# Altium PCB PCB1.PcbDoc (part 3 of 3)
Units mil, origin at the board's own origin, x right, y up, seen from the top; angles counter-clockwise.
Board outline 1614.17 x 4106.3 mil, 2 copper layers (Top Layer, Bottom Layer), stack 61.8 mil thick; 17 components, 26 nets, 94 pads, 42 vias.
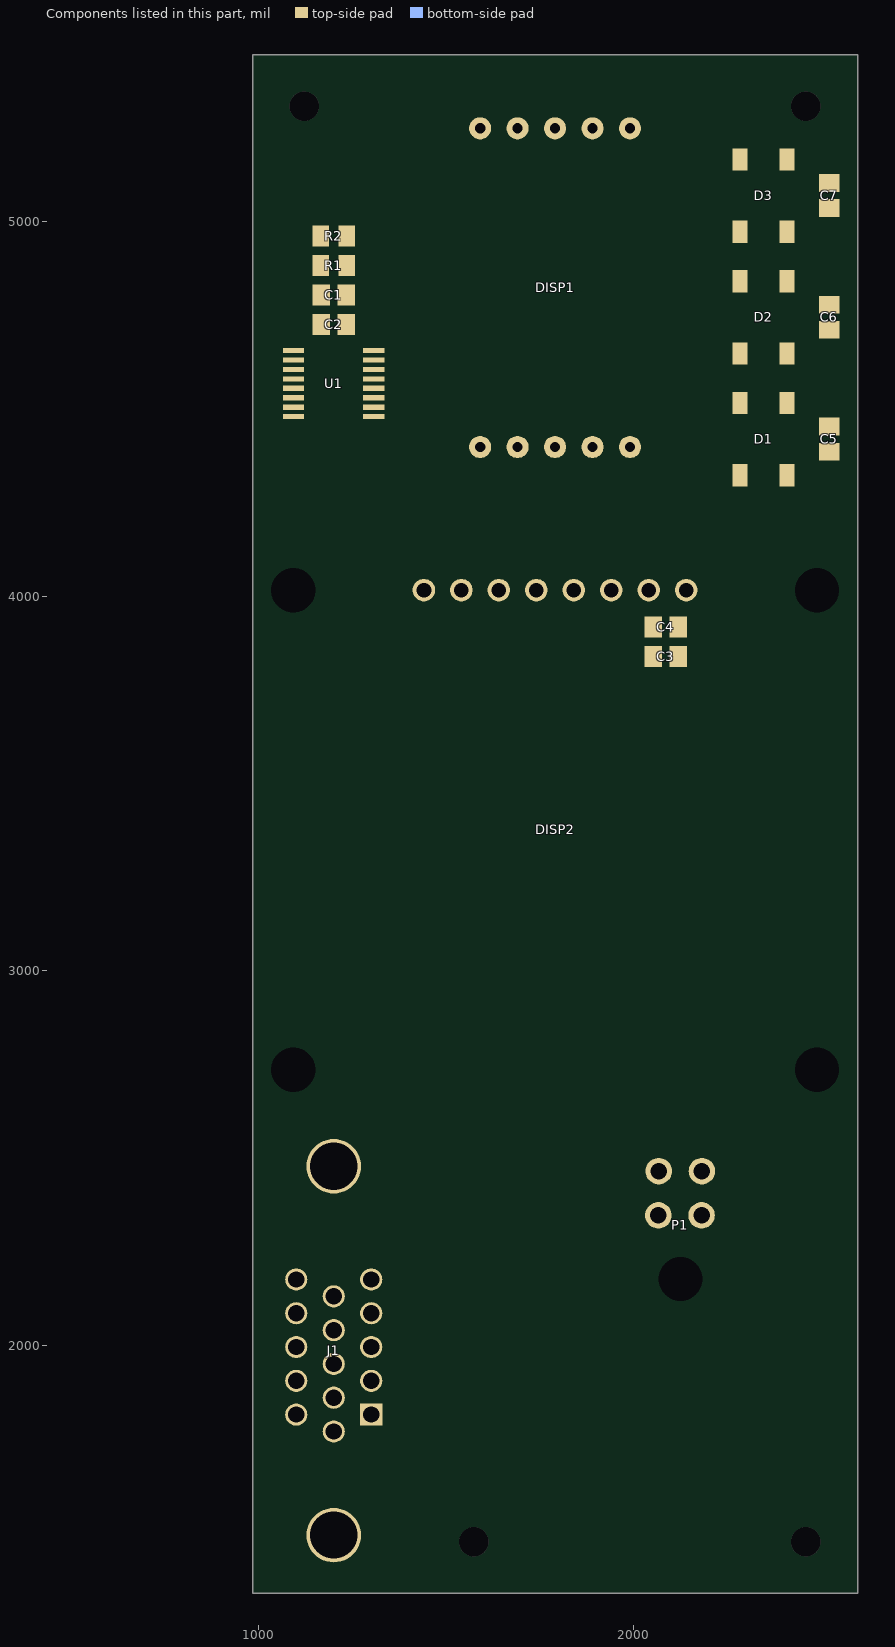
[diagram p3: the components of this part, seen from the top]

## Via types
v1: diameter 35.43/35.43 (per signal layer), hole 11.81, Top Layer to Bottom Layer, tented both sides, 42 vias

## Nets (pads, with @x,y where several pads share a name; then routed paths per layer and width w, separated by ;. In a path a pad name is that pad's centre, name@x,y a point inside that pad or via, vN(x,y) a via of type N, cw(c..) or ccw(c..) an arc to the next point about the centre after c; other vN are vias at no path point) (continued)
copper on no net: (continued)
  Bottom Layer w1: 2175.4,1628 2215.4,1628 ; 2175.4,1629 2215.4,1629 ; 2175.4,1630 2215.4,1630 ; 2175.4,1631 2215.4,1631 ; 2175.4,1632 2215.4,1632 ; 2175.4,1633 2215.4,1633 ; 2175.4,1634 2215.4,1634 ; 2175.4,1635 2215.4,1635 ; 2175.4,1636 2215.4,1636 ; 2175.4,1637 2215.4,1637 ; 2175.4,1638 2215.4,1638 ; 2175.4,1639 2215.4,1639 ; 2175.4,1640 2215.4,1640 ; 2175.4,1641 2215.4,1641 ; 2175.4,1642 2215.4,1642 ; 2175.4,1643 2214.4,1643 ; 2175.4,1644 2213.4,1644 ; 2175.4,1645 2181.4,1645 ; 2175.4,1646 2180.4,1646 ; 2175.4,1647 2179.4,1647 ; 2175.4,1648 2179.4,1648 ; 2175.4,1649 2179.4,1649 ; 2175.4,1650 2179.4,1650 ; 2189.4,1693 2206.4,1693 ; 2189.4,1694 2206.4,1694 ; 2189.4,1695 2206.4,1695 ; 2189.4,1696 2206.4,1696 ; 2189.4,1697 2206.4,1697 ; 2189.4,1698 2206.4,1698 ; 2189.4,1699 2206.4,1699 ; 2189.4,1700 2206.4,1700 ; 2189.4,1701 2206.4,1701 ; 2189.4,1702 2206.4,1702 ; 2189.4,1703 2206.4,1703 ; 2189.4,1704 2206.4,1704 ; 2189.4,1705 2206.4,1705 ; 2189.4,1706 2206.4,1706 ; 2189.4,1707 2206.4,1707 ; 2189.4,1708 2206.4,1708 ; 2189.4,1709 2206.4,1709 ; 2189.4,1710 2206.4,1710 ; 2189.4,1711 2206.4,1711 ; 2189.4,1712 2206.4,1712 ; 2189.4,1713 2206.4,1713 ; 2194.4,1845 2362.4,1845 ; 2198.4,1744 2235.4,1744 ; 2202.4,1844 2362.4,1844 ; 2205.4,1743 2233.4,1743 ; 2209.4,1742 2233.4,1742 ; 2211.4,1741 2233.4,1741 ; 2211.4,1843 2362.4,1843 ; 2212.4,1611 2230.4,1611 ; 2213.4,1740 2233.4,1740 ; 2215.4,1612 2228.4,1612 ; 2215.4,1651 2228.4,1651 ; 2215.4,1739 2233.4,1739 ; 2217.4,1613 2228.4,1613 ; 2217.4,1650 2228.4,1650 ; 2217.4,1738 2233.4,1738 ; 2218.4,1737 2233.4,1737 ; 2218.4,1842 2362.4,1842 ; 2219.4,1614 2228.4,1614 ; 2219.4,1649 2228.4,1649 ; 2219.4,1736 2233.4,1736 ; 2220.4,1615 2228.4,1615 ; 2220.4,1648 2228.4,1648 ; 2221.4,1616 2228.4,1616 ; 2221.4,1617 2228.4,1617 ; 2221.4,1646 2228.4,1646 ; 2221.4,1647 2228.4,1647 ; 2221.4,1735 2233.4,1735 ; 2222.4,1618 2228.4,1618 ; 2222.4,1619 2228.4,1619 ; 2222.4,1644 2228.4,1644 ; 2222.4,1645 2228.4,1645 ; 2222.4,1734 2233.4,1734 ; 2223.4,1620 2228.4,1620 ; 2223.4,1621 2228.4,1621 ; 2223.4,1622 2228.4,1622 ; 2223.4,1623 2228.4,1623 ; 2223.4,1624 2228.4,1624 ; 2223.4,1625 2228.4,1625 ; 2223.4,1626 2228.4,1626 ; 2223.4,1627 2228.4,1627 ; 2223.4,1628 2228.4,1628 ; 2223.4,1629 2228.4,1629 ; 2223.4,1630 2228.4,1630 ; 2223.4,1631 2228.4,1631 ; 2223.4,1632 2228.4,1632 ; 2223.4,1633 2228.4,1633 ; 2223.4,1634 2228.4,1634 ; 2223.4,1635 2228.4,1635 ; 2223.4,1636 2228.4,1636 ; 2223.4,1637 2228.4,1637 ; 2223.4,1638 2228.4,1638 ; 2223.4,1639 2228.4,1639 ; 2223.4,1640 2228.4,1640 ; 2223.4,1641 2228.4,1641 ; 2223.4,1642 2228.4,1642 ; 2223.4,1643 2228.4,1643 ; 2223.4,1732 2233.4,1732 ; 2223.4,1733 2233.4,1733 ; 2224.4,1731 2233.4,1731 ; 2225.4,1730 2233.4,1730 ; 2226.4,1728 2233.4,1728 ; 2226.4,1729 2233.4,1729 ; 2227.4,1726 2233.4,1726 ; 2227.4,1727 2233.4,1727 ; 2228.4,1723 2233.4,1723 ; 2228.4,1724 2233.4,1724 ; 2228.4,1725 2233.4,1725 ; 2229.4,1718 2233.4,1718 ; 2229.4,1719 2233.4,1719 ; 2229.4,1720 2233.4,1720 ; 2229.4,1721 2233.4,1721 ; 2229.4,1722 2233.4,1722 ; 2229.4,1839 2362.4,1839 ; 2229.4,1840 2362.4,1840 ; 2229.4,1841 2362.4,1841 ; 2230.4,1687 2233.4,1687 ; 2230.4,1688 2233.4,1688 ; 2230.4,1689 2233.4,1689 ; 2230.4,1690 2233.4,1690 ; 2230.4,1691 2233.4,1691 ; 2230.4,1692 2233.4,1692 ; 2230.4,1693 2233.4,1693 ; 2230.4,1694 2233.4,1694 ; 2230.4,1695 2233.4,1695 ; 2230.4,1696 2233.4,1696 ; 2230.4,1697 2233.4,1697 ; 2230.4,1698 2233.4,1698 ; 2230.4,1699 2233.4,1699 ; 2230.4,1700 2233.4,1700 ; 2230.4,1701 2233.4,1701 ; 2230.4,1702 2233.4,1702 ; 2230.4,1703 2233.4,1703 ; 2230.4,1704 2233.4,1704 ; 2230.4,1705 2233.4,1705 ; 2230.4,1706 2233.4,1706 ; 2230.4,1707 2233.4,1707 ; 2230.4,1708 2233.4,1708 ; 2230.4,1709 2233.4,1709 ; 2230.4,1710 2233.4,1710 ; 2230.4,1711 2233.4,1711 ; 2230.4,1712 2233.4,1712 ; 2230.4,1713 2233.4,1713 ; 2230.4,1714 2233.4,1714 ; 2230.4,1715 2233.4,1715 ; 2230.4,1716 2233.4,1716 ; 2230.4,1717 2233.4,1717 ; 2232.4,1611 2279.4,1611 ; 2234.4,1612 2276.4,1612 ; 2235.4,1613 2274.4,1613 ; 2235.4,1614 2273.4,1614 ; 2235.4,1615 2271.4,1615 ; 2235.4,1616 2270.4,1616 ; 2235.4,1617 2269.4,1617 ; 2235.4,1618 2268.4,1618 ; 2235.4,1619 2268.4,1619 ; 2235.4,1620 2267.4,1620 ; 2235.4,1621 2266.4,1621 ; 2235.4,1622 2265.4,1622 ; 2235.4,1623 2265.4,1623 ; 2235.4,1624 2264.4,1624 ; 2235.4,1625 2263.4,1625 ; 2235.4,1626 2263.4,1626 ; 2235.4,1627 2262.4,1627 ; 2235.4,1628 2262.4,1628 ; 2235.4,1629 2261.4,1629 ; 2235.4,1630 2260.4,1630 ; 2235.4,1631 2260.4,1631 ; 2235.4,1632 2259.4,1632 ; 2235.4,1633 2259.4,1633 ; 2235.4,1634 2258.4,1634 ; 2235.4,1635 2257.4,1635 ; 2235.4,1636 2257.4,1636 ; 2235.4,1637 2256.4,1637 ; 2235.4,1638 2255.4,1638 ; 2235.4,1639 2255.4,1639 ; 2235.4,1640 2254.4,1640 ; 2235.4,1641 2253.4,1641 ; 2235.4,1642 2252.4,1642 ; 2235.4,1643 2251.4,1643 ; 2235.4,1644 2249.4,1644 ; 2252.4,1651 2289.4,1651 ; 2254.4,1650 2287.4,1650 ; 2255.4,1649 2285.4,1649 ; 2257.4,1648 2284.4,1648 ; 2257.4,1663 2260.4,1663 ; 2257.4,1664 2260.4,1664 ; 2257.4,1665 2260.4,1665 ; 2257.4,1666 2260.4,1666 ; 2257.4,1667 2260.4,1667 ; 2257.4,1668 2260.4,1668 ; 2257.4,1669 2260.4,1669 ; 2257.4,1670 2260.4,1670 ; 2257.4,1671 2260.4,1671 ; 2257.4,1672 2260.4,1672 ; 2257.4,1673 2260.4,1673 ; 2257.4,1674 2260.4,1674 ; 2257.4,1675 2260.4,1675 ; 2257.4,1676 2260.4,1676 ; 2257.4,1677 2260.4,1677 ; 2257.4,1678 2260.4,1678 ; 2257.4,1679 2260.4,1679 ; 2257.4,1680 2260.4,1680 ; 2257.4,1681 2260.4,1681 ; 2257.4,1682 2260.4,1682 ; 2257.4,1683 2260.4,1683 ; 2257.4,1684 2298.4,1684 ; 2257.4,1685 2297.4,1685 ; 2257.4,1686 2297.4,1686 ; 2257.4,1687 2296.4,1687 ; 2257.4,1688 2296.4,1688 ; 2257.4,1689 2296.4,1689 ; 2257.4,1690 2295.4,1690 ; 2257.4,1691 2295.4,1691 ; 2257.4,1692 2294.4,1692 ; 2257.4,1693 2294.4,1693 ; 2257.4,1694 2293.4,1694 ; 2257.4,1695 2293.4,1695 ; 2257.4,1696 2292.4,1696 ; 2257.4,1697 2292.4,1697 ; 2257.4,1698 2291.4,1698 ; 2257.4,1699 2291.4,1699 ; 2257.4,1700 2290.4,1700 ; 2257.4,1701 2290.4,1701 ; 2257.4,1702 2289.4,1702 ; 2257.4,1703 2289.4,1703 ; 2257.4,1704 2288.4,1704 ; 2257.4,1705 2288.4,1705 ; 2257.4,1706 2287.4,1706 ; 2257.4,1707 2287.4,1707 ; 2257.4,1708 2286.4,1708 ; 2257.4,1709 2286.4,1709 ; 2257.4,1710 2285.4,1710 ; 2257.4,1711 2285.4,1711 ; 2257.4,1712 2284.4,1712 ; 2257.4,1713 2284.4,1713 ; 2257.4,1714 2283.4,1714 ; 2257.4,1715 2282.4,1715 ; 2257.4,1716 2281.4,1716 ; 2257.4,1717 2281.4,1717 ; 2257.4,1718 2280.4,1718 ; 2257.4,1719 2278.4,1719 ; 2257.4,1720 2277.4,1720 ; 2257.4,1721 2275.4,1721 ; 2257.4,1722 2273.4,1722 ; 2258.4,1647 2283.4,1647 ; 2259.4,1646 2283.4,1646 ; 2260.4,1644 2282.4,1644 ; 2260.4,1645 2282.4,1645 ; 2261.4,1643 2281.4,1643 ; 2262.4,1642 2281.4,1642 ; 2263.4,1640 2281.4,1640 ; 2263.4,1641 2281.4,1641 ; 2264.4,1639 2281.4,1639 ; 2265.4,1637 2281.4,1637 ; 2265.4,1638 2281.4,1638 ; 2265.4,1744 2362.4,1744 ; 2266.4,1635 2282.4,1635 ; 2266.4,1636 2282.4,1636 ; 2267.4,1634 2283.4,1634 ; 2268.4,1632 2284.4,1632 ; 2268.4,1633 2283.4,1633 ; 2269.4,1630 2287.4,1630 ; 2269.4,1631 2285.4,1631 ; 2270.4,1629 2289.4,1629 ; 2271.4,1627 2306.4,1627 ; 2271.4,1628 2293.4,1628 ; 2272.4,1626 2308.4,1626 ; 2273.4,1624 2309.4,1624 ; 2273.4,1625 2309.4,1625 ; 2274.4,1623 2309.4,1623 ; 2275.4,1622 2309.4,1622 ; 2276.4,1621 2309.4,1621 ; 2277.4,1620 2308.4,1620 ; 2278.4,1619 2307.4,1619 ; 2278.4,1743 2362.4,1743 ; 2280.4,1742 2362.4,1742 ; 2281.4,1618 2304.4,1618 ; 2282.4,1741 2362.4,1741 ; 2285.4,1740 2362.4,1740 ; 2287.4,1739 2362.4,1739 ; 2289.4,1638 2322.4,1638 ; 2289.4,1639 2322.4,1639 ; 2289.4,1640 2322.4,1640 ; 2289.4,1641 2322.4,1641 ; 2289.4,1642 2322.4,1642 ; 2289.4,1738 2362.4,1738 ; 2290.4,1637 2323.4,1637 ; 2290.4,1643 2321.4,1643 ; 2291.4,1644 2320.4,1644 ; 2291.4,1737 2362.4,1737 ; 2292.4,1636 2323.4,1636 ; 2292.4,1736 2362.4,1736 ; 2294.4,1735 2362.4,1735 ; 2295.4,1734 2362.4,1734 ; 2296.4,1733 2362.4,1733 ; 2297.4,1732 2362.4,1732 ; 2298.4,1731 2362.4,1731 ; 2299.4,1730 2362.4,1730 ; 2300.4,1635 2323.4,1635 ; 2300.4,1729 2362.4,1729 ; 2301.4,1727 2362.4,1727 ; 2301.4,1728 2362.4,1728 ; 2302.4,1726 2362.4,1726 ; 2303.4,1724 2362.4,1724 ; 2303.4,1725 2362.4,1725 ; 2304.4,1723 2362.4,1723 ; 2305.4,1721 2362.4,1721 ; 2305.4,1722 2362.4,1722 ; 2306.4,1611 2325.4,1611 ; 2306.4,1719 2362.4,1719 ; 2306.4,1720 2362.4,1720 ; 2307.4,1717 2362.4,1717 ; 2307.4,1718 2362.4,1718 ; 2308.4,1634 2323.4,1634 ; 2308.4,1715 2362.4,1715 ; 2308.4,1716 2362.4,1716 ; 2309.4,1612 2324.4,1612 ; 2309.4,1713 2362.4,1713 ; 2309.4,1714 2362.4,1714 ; 2310.4,1711 2362.4,1711 ; 2310.4,1712 2362.4,1712 ; 2311.4,1613 2323.4,1613 ; 2311.4,1633 2323.4,1633 ; 2311.4,1708 2362.4,1708 ; 2311.4,1709 2362.4,1709 ; 2311.4,1710 2362.4,1710 ; 2312.4,1614 2322.4,1614 ; 2312.4,1706 2362.4,1706 ; 2312.4,1707 2362.4,1707 ; 2313.4,1615 2322.4,1615 ; 2313.4,1632 2323.4,1632 ; 2313.4,1704 2362.4,1704 ; 2313.4,1705 2362.4,1705 ; 2314.4,1616 2322.4,1616 ; 2314.4,1631 2323.4,1631 ; 2314.4,1702 2362.4,1702 ; 2314.4,1703 2362.4,1703 ; 2315.4,1617 2322.4,1617 ; 2315.4,1630 2322.4,1630 ; 2315.4,1700 2362.4,1700 ; 2315.4,1701 2362.4,1701 ; 2316.4,1618 2322.4,1618 ; 2316.4,1619 2322.4,1619 ; 2316.4,1620 2322.4,1620 ; 2316.4,1627 2322.4,1627 ; 2316.4,1628 2322.4,1628 ; 2316.4,1629 2322.4,1629 ; 2316.4,1698 2362.4,1698 ; 2316.4,1699 2362.4,1699 ; 2317.4,1621 2322.4,1621 ; 2317.4,1622 2322.4,1622 ; 2317.4,1623 2322.4,1623 ; 2317.4,1624 2322.4,1624 ; 2317.4,1625 2322.4,1625 ; 2317.4,1626 2322.4,1626 ; 2317.4,1696 2362.4,1696 ; 2317.4,1697 2362.4,1697 ; 2318.4,1694 2362.4,1694 ; 2318.4,1695 2362.4,1695 ; 2319.4,1692 2362.4,1692 ; 2319.4,1693 2362.4,1693 ; 2320.4,1690 2362.4,1690 ; 2320.4,1691 2362.4,1691 ; 2321.4,1688 2362.4,1688 ; 2321.4,1689 2362.4,1689 ; 2322.4,1651 2362.4,1651 ; 2322.4,1686 2362.4,1686 ; 2322.4,1687 2362.4,1687 ; 2323.4,1684 2362.4,1684 ; 2323.4,1685 2362.4,1685 ; 2324.4,1650 2362.4,1650 ; 2324.4,1682 2362.4,1682 ; 2324.4,1683 2362.4,1683 ; 2325.4,1679 2362.4,1679 ; 2325.4,1680 2362.4,1680 ; 2325.4,1681 2362.4,1681 ; 2326.4,1649 2362.4,1649 ; 2326.4,1677 2362.4,1677 ; 2326.4,1678 2362.4,1678 ; 2327.4,1648 2362.4,1648 ; 2327.4,1675 2362.4,1675 ; 2327.4,1676 2362.4,1676 ; 2328.4,1611 2362.4,1611 ; 2328.4,1646 2362.4,1646 ; 2328.4,1647 2362.4,1647 ; 2328.4,1673 2362.4,1673 ; 2328.4,1674 2362.4,1674 ; 2329.4,1612 2362.4,1612 ; 2329.4,1644 2362.4,1644 ; 2329.4,1645 2362.4,1645 ; 2329.4,1671 2362.4,1671 ; 2329.4,1672 2362.4,1672 ; 2330.4,1613 2362.4,1613 ; 2330.4,1614 2362.4,1614 ; 2330.4,1615 2362.4,1615 ; 2330.4,1616 2362.4,1616 ; 2330.4,1617 2362.4,1617 ; 2330.4,1618 2362.4,1618 ; 2330.4,1619 2362.4,1619 ; 2330.4,1620 2362.4,1620 ; 2330.4,1621 2362.4,1621 ; 2330.4,1622 2362.4,1622 ; 2330.4,1623 2362.4,1623 ; 2330.4,1624 2362.4,1624 ; 2330.4,1625 2362.4,1625 ; 2330.4,1626 2362.4,1626 ; 2330.4,1627 2362.4,1627 ; 2330.4,1628 2362.4,1628 ; 2330.4,1629 2362.4,1629 ; 2330.4,1630 2362.4,1630 ; 2330.4,1631 2362.4,1631 ; 2330.4,1632 2362.4,1632 ; 2330.4,1633 2362.4,1633 ; 2330.4,1634 2362.4,1634 ; 2330.4,1635 2362.4,1635 ; 2330.4,1636 2362.4,1636 ; 2330.4,1637 2362.4,1637 ; 2330.4,1638 2362.4,1638 ; 2330.4,1639 2362.4,1639 ; 2330.4,1640 2362.4,1640 ; 2330.4,1641 2362.4,1641 ; 2330.4,1642 2362.4,1642 ; 2330.4,1643 2362.4,1643 ; 2330.4,1668 2362.4,1668 ; 2330.4,1669 2362.4,1669 ; 2330.4,1670 2362.4,1670 ; 2331.4,1666 2362.4,1666 ; 2331.4,1667 2362.4,1667 ; 2332.4,1663 2362.4,1663 ; 2332.4,1664 2362.4,1664 ; 2332.4,1665 2362.4,1665

## Polygon pours and split planes (outlines as drawn)
GND on Bottom Layer "Bottom_GND" (solid, remove dead copper, pour order 2): 984.25,1338.58 984.25,5444.88 2598.43,5444.88 2598.43,1338.58
GND on Top Layer "TOP_GND" (solid, remove dead copper, pour order 4): 984.25,1338.58 984.25,5444.88 2598.43,5444.88 2598.43,1338.58

## Keep-outs
Keep-Out Layer:
  lines w10: 984.25,1338.58 984.25,5442.91 2598.43,5442.91 2598.43,1338.58 984.25,1338.58

## Other copper
Bottom Layer:
  text "v 1.0" at 1580,1640 h60

## Text inside footprints (layer, text, board x,y; h text height)
J1: Top Overlay "15" at 1125.79,2235.82 h50 r90; Top Overlay "1" at 1325.79,1735.82 h50 r90